# Altium PCB boost.PcbDoc
Units mm, origin at the board's own origin, x right, y up, seen from the top; angles counter-clockwise.
Board outline 50.04 x 50.04 mm, 2 copper layers (Top Layer, Bottom Layer); 27 components, 16 nets, 93 pads, 36 vias.
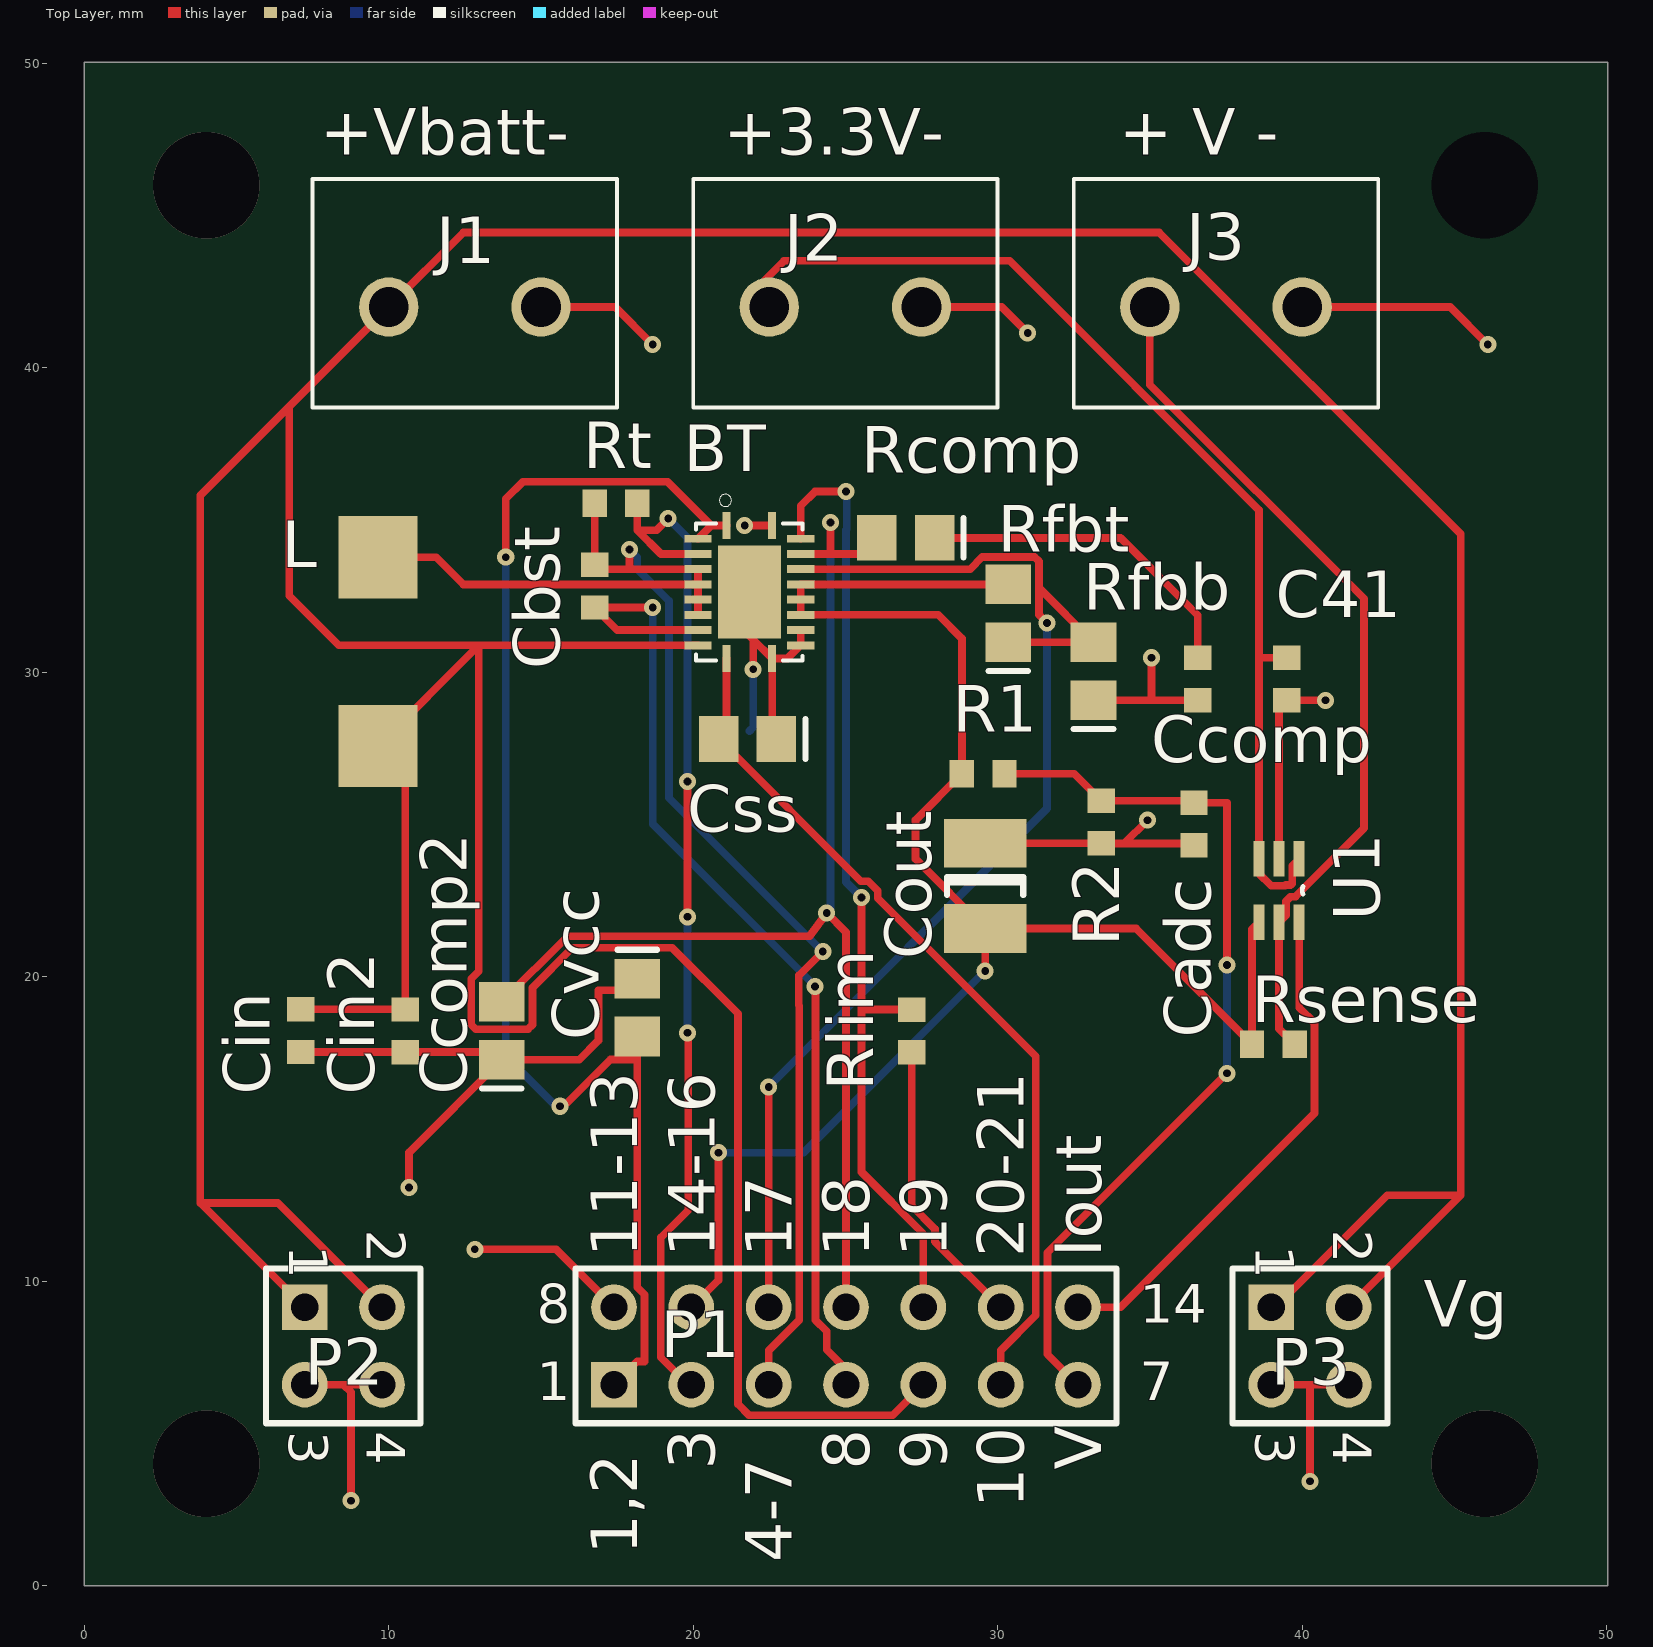
[diagram p0: Top Layer view]
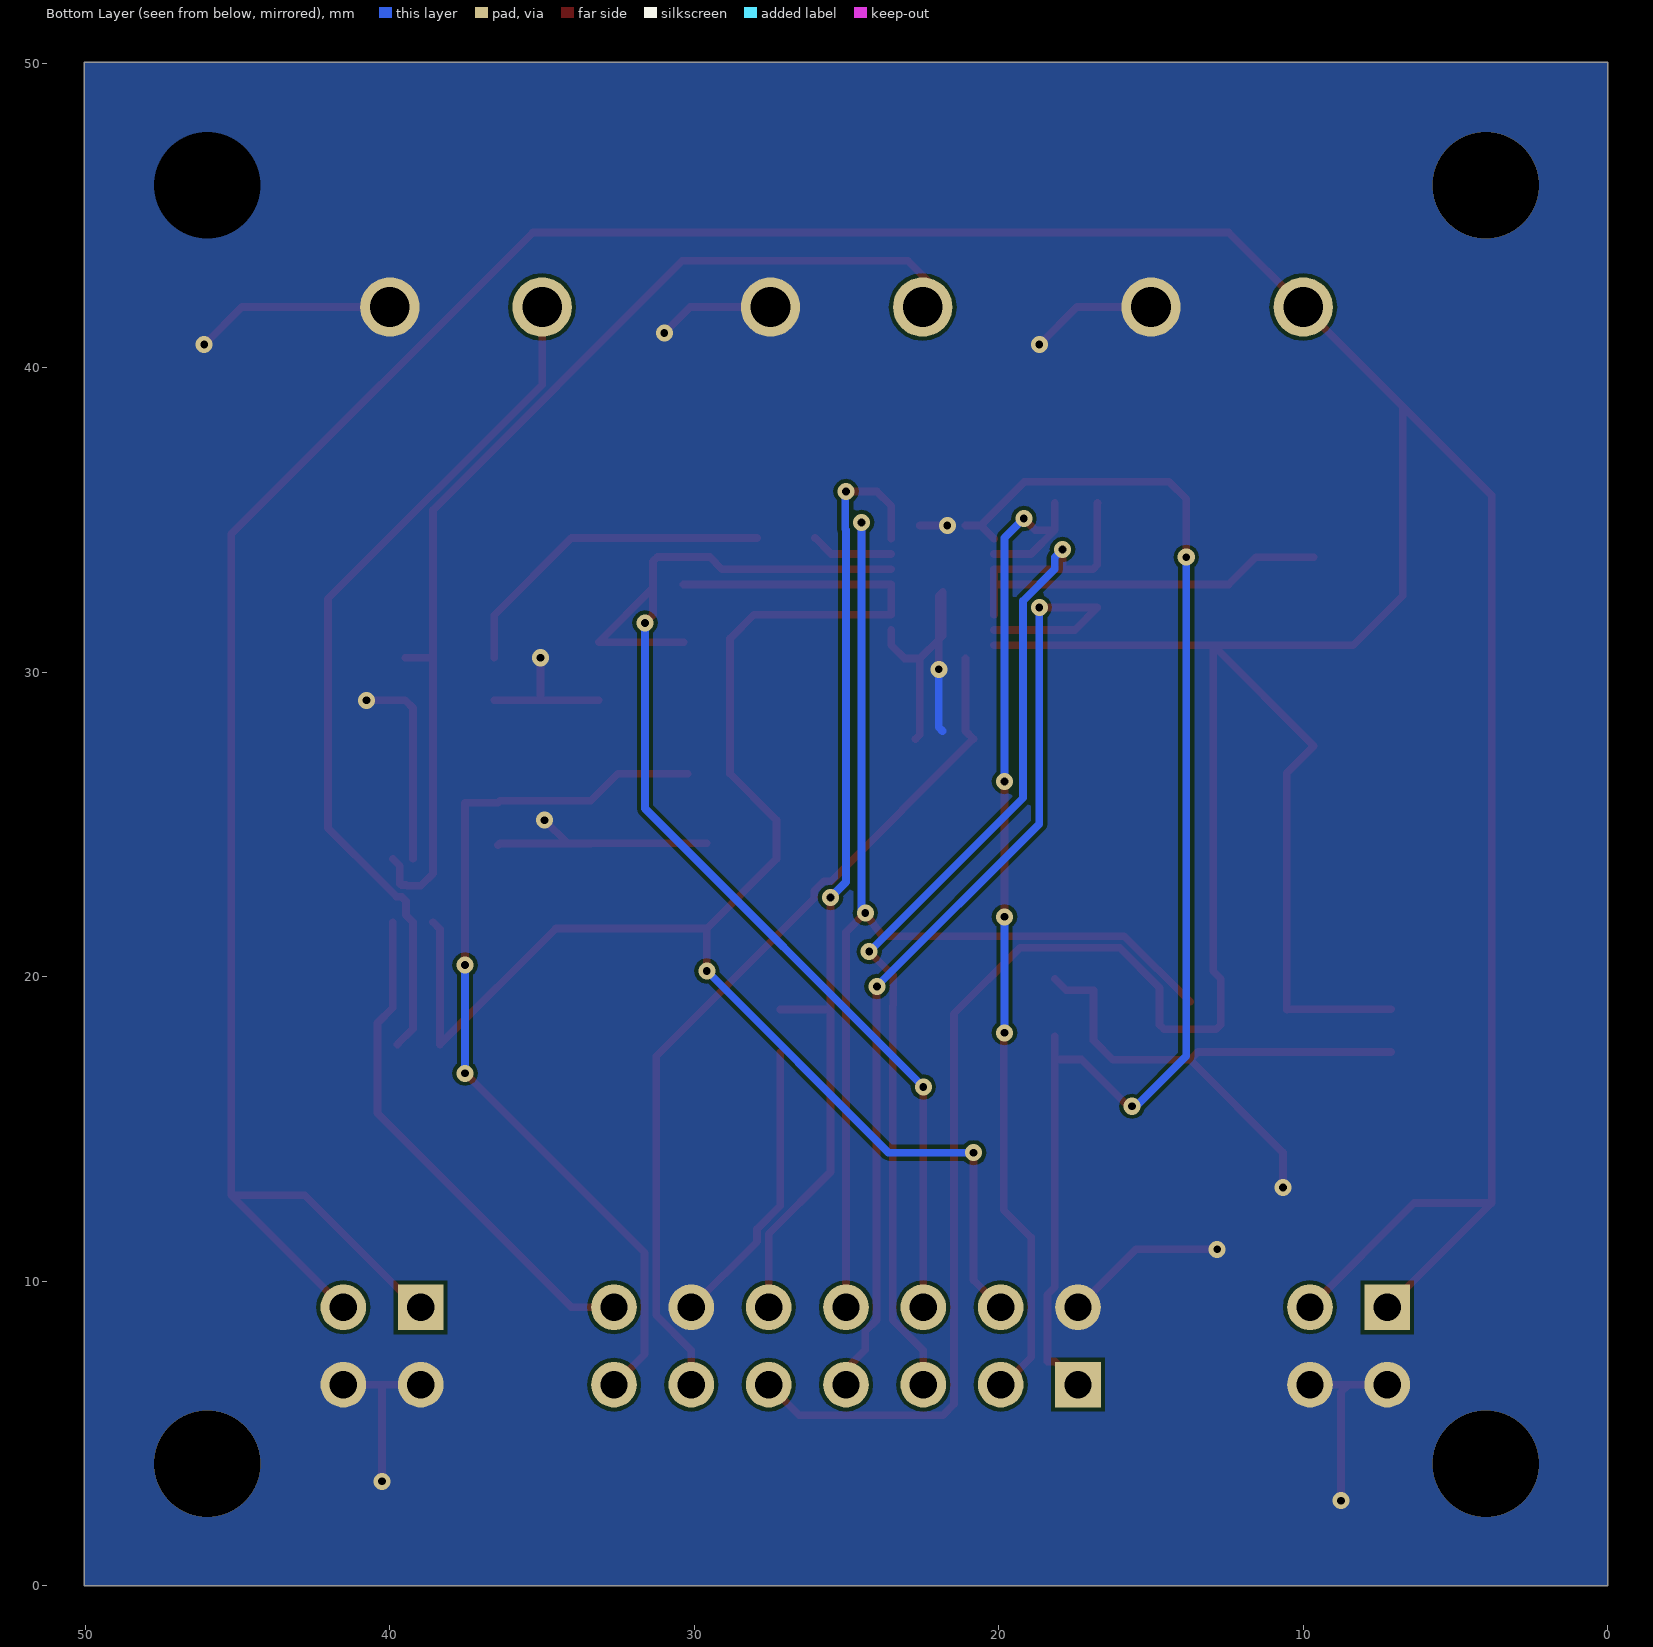
[diagram p1: Bottom Layer view, seen from below]

## Layer stack, top to bottom
Top Solder: solder mask 0.0102, Solder Resist, Dk 3.5
Top Layer: signal copper 0.0356
Dielectric 1: dielectric 0.32, FR-4, Dk 4.8
Bottom Layer: signal copper 0.0356
Bottom Solder: solder mask 0.0102, Solder Resist, Dk 3.5

## Board outline
0,0 0,50.038 50.038,50.038 50.038,0

## Design rules (kind name [scope] priority, off if disabled: settings)
AssemblyTestPointUsage [All] p1 off:
AssemblyTestpoint [All] p1 off: testpointundercomponent=TRUE minsize=1.016 maxsize=2.54 preferedsize=1.524 minholesize=0 maxholesize=1.016 preferedholesize=0.813 testpointgrid=0.025 usegrid=TRUE gridtolerance=0 allowsidetop=TRUE allowsidebottom=TRUE
Clearance [All] p1: gap=0.127 ignorepadtopadclearanceinfootprint=FALSE except(0: Arc-Hole Track-Hole SMDPad-Hole THPad-Hole Via-Hole Fill-Hole Poly-Hole Region-Hole Text-Hole)
FabricationTestPointUsage [All] p1 off: valid=0 allowmultiple=FALSE
FabricationTestpoint [All] p1 off: side=3 testpointundercomponent=FALSE minsize=1.016 maxsize=2.54 preferedsize=1.524 minholesize=0 maxholesize=1.016 preferedholesize=0.813 testpointgrid=0.025 allowsidetop=TRUE allowsidebottom=TRUE usegrid=TRUE gridtolerance=0
HoleSize [All] p1: absolutevalues=TRUE maxlimit=6.35 minlimit=0.203 maxpercent=80.000 minpercent=20.000
MinimumAnnularRing [All] p1: minimumring=0.127
MinimumSolderMaskSliver [All] p1: minsoldermaskwidth=0.102
PlaneConnect [All] p1: planeconnectstyle=Direct reliefexpansion=0.508 reliefentries=4 reliefconductorwidth=0.254 reliefairgap=0.254
PolygonConnect [All] p1: connectstyle=Direct reliefconductorwidth=0.254 reliefentries=4 polygonreliefangle="90 Angle" airgapwidth=0.254
RoutingVias [All] p1: holewidth=0.254 width=0.559 viastyle="Through Hole" minholewidth=0.254 minwidth=0.559 maxholewidth=12.7 maxwidth=12.7
SilkToSilkClearance [All] p1: silktosilkclearance=0
SilkToSolderMaskClearance [IsPad] p1: minsilkscreentomaskgap=0.076 clearancetoexposedcopper=TRUE
SolderMaskExpansion [All] p1: expansion=0.102
Width [All] p1: maxlimit=254 minlimit=0.152 preferedwidth=0.254
21 further rules are at their usual default settings.

## Components (designator, comment, footprint, x,y, rotation, side; value= is the part's Value field where it differs from the comment)
BT "TPS61088" QFN50P450X350X100-21N 21.844,32.639 r0 top
C41 "Cap Semi" 1608[0603] 39.497,29.783 r90 top value=0.1uF
Cadc "" 1608[0603] 36.449,25.019 r270 top value=0.1µF
Cbst "" 1608[0603] 16.764,32.831 r270 top value=100nF
Ccomp "" 1608[0603] 36.576,29.78 r90 top value=470pF
Ccomp2 "" 0805 13.716,18.227 r90 top value=22pF
Cin "" 1608[0603] 7.112,18.23 r90 top value=47µF
Cin2 "" 1608[0603] 10.541,18.227 r90 top value=100nF
Cout "" 1210 29.591,22.984 r270 top value=100µF
Css "8.2nF" 0805 21.783,27.813 r180 top
Cvcc "" 0805 18.161,18.989 r270 top value=2.2µF
J1 "691102710002" 691102710002 12.5,42 r0 top
J2 "691102710002" 691102710002 25,42 r0 top
J3 "691102710002" 691102710002 37.5,42 r0 top
L "" 2-SMD 9.652,30.682 r90 top value=600nH
P1 "Header 7X2A" HDR2X7_CEN 17.399,6.604 r0 top
P2 "Header 2X2" HDR2X2 7.239,9.144 r270 top
P3 "Header 2X2" HDR2X2 38.989,9.144 r270 top
R1 "" 1608[0603] 29.526,26.67 r180 top value=100kO
R2 "" 1608[0603] 33.401,25.081 r90 top value=100kO
Rcomp "" 0805 26.985,34.417 r180 top value=44.2kO
Rfbb "" 0805 33.147,30.033 r90 top value=69.8kO
Rfbt "" 0805 30.353,31.938 r90 top value=220kO
Rlim "" 1608[0603] 27.178,18.223 r90 top value=105kO
Rsense "" 1608[0603] 39.054,17.78 r0 top value=10mO
Rt "RtA1" 1608[0603] 17.461,35.56 r0 top value=267kO
U1 "INA214" SOT65P210X110-6N 39.243,22.835 r270 top

## Footprints (in the part's own frame and the unit in brackets; to place one, negate y for a bottom-side part, rotate by r counter-clockwise, add the part's x,y. Pads: shape width x height; smd on the part's side, far side on the other; paste and mask are expansions set on the pad)
2-SMD [mm]
  rect 2.7x2.6 smd: 1(-3.1,0) 2(3.1,0)
0805 [mm] "Chip Capacitor; Body 2.0 x 1.2 mm (LxW typ)"
  rect 1.3x1.5 smd: 1(-0.95,0) 2(0.95,0)
  silkscreen extent -1.9,-0.65 -1.9,0.65
1210 [mm] "Chip Capacitor; Body 3.2 x 2.5 mm (LxW typ)"
  rect 1.6x2.7 smd: 1(-1.4,0) 2(1.4,0)
  silkscreen extent -0.3,-1.25 0.3,1.25
1608[0603] [mm] "Chip Capacitor, Body 1.6x0.8mm, IPC High Density"
  rect 0.8x0.9 smd: 1(-0.7,0) 2(0.7,0)
  body extent -0.87,-0.48 0.87,0.48, height 1.3
691102710002 [mm]
  round 1.95 hole 1.3: 1(-2.5,0) 2(2.5,0)
  silkscreen extent -5,-3.3 5,4.2
HDR2X2 [mm] "Connector; Header; 2x2 Position"
  rect 1.5x1.5 hole 0.9: 1(0,0)
  round 1.5 hole 0.9: 2(0,2.54) 3(2.54,0) 4(2.54,2.54)
  silkscreen extent -1.27,-1.27 3.81,3.81
HDR2X7_CEN [mm] "Connector; Header; 7x2 Position"
  rect 1.5x1.5 hole 0.9: 1(0,0)
  round 1.5 hole 0.9: 2(2.54,0) 3(5.08,0) 4(7.62,0) 5(10.16,0) 6(12.7,0) 7(15.24,0) 8(0,2.54) 9(2.54,2.54) 10(5.08,2.54) 11(7.62,2.54) 12(10.16,2.54) 13(12.7,2.54) 14(15.24,2.54)
  silkscreen extent -1.27,-1.27 16.51,3.81
QFN50P450X350X100-21N [mm]
  rect 0.26x0.9 smd: 1(-0.75,2.185) 10(-0.75,-2.185) 11(0.75,-2.185) 20(0.75,2.185)
  rect 0.9x0.26 smd: 2(-1.685,1.75) 3(-1.685,1.25) 4(-1.685,0.75) 5(-1.685,0.25) 6(-1.685,-0.25) 7(-1.685,-0.75) 8(-1.685,-1.25) 9(-1.685,-1.75) 12(1.685,-1.75) 13(1.685,-1.25) 14(1.685,-0.75) 15(1.685,-0.25) 16(1.685,0.25) 17(1.685,0.75) 18(1.685,1.25) 19(1.685,1.75)
  rect 2.07x3.07 smd: 21(0,0)
  silkscreen extent -1.75,-2.25 1.75,3.21
SOT65P210X110-6N [mil]
  rect 46x14 smd: 1(-41,26) 2(-41,0) 3(-41,-26) 4(41,-26) 5(41,0) 6(41,26)
  silkscreen extent -5,30 5,31

## Part data
BT: "Boost converter"
C41: "Capacitor (Semiconductor SIM Model)", LatestRevisionDate=29-May-2009, LatestRevisionNote="IPC-7351 Footprint Added.", PackageDescription="Chip Capacitor", PackageReference=C1206, Published=8-Jun-2000, Publisher="Altium Limited"
Cadc Cbst Ccomp Ccomp2 Cin Cin2 Cout Css Cvcc: library part Cap, "Capacitor", LatestRevisionDate=17-Jul-2002, LatestRevisionNote="Re-released for DXP Platform.", PackageDescription="Radial Cap, Thru-Hole; 2 Leads; 0.3 in Pin Spacing", PackageReference=RAD-0.3, Published=8-Jun-2000, Publisher="Altium Limited"
J1 J2 J3: "102 Series 5mm Pitch Straight, PCB Terminal Block, Through Hole, 2 Way", Package=None, Availability=Unavailable, MF="Wurth Electronics", MP=691102710002, Price=None, SnapEDA_Link=https://www.snapeda.com/parts/691102710002/Wurth%20Electronics%20Inc/view-part/?ref=snap
L: library part Inductor, "Inductor", Code_IEC=1005, Code_JEITA=0402, LatestRevisionDate=29-May-2009, LatestRevisionNote="IPC-7351 Footprint Added.", PackageDescription="Chip Inductor", PackageReference=0402-A, Published=8-Jun-2000, Publisher="Altium Limited"
P1: "Header, 7-Pin, Dual row", LatestRevisionDate=17-Jul-2002, LatestRevisionNote="Re-released for DXP Platform.", Publisher="Altium Limited"
P2 P3: "Header, 2-Pin, Dual row", LatestRevisionDate=17-Jul-2002, LatestRevisionNote="Re-released for DXP Platform.", Publisher="Altium Limited"
R1 R2 Rcomp Rfbb Rfbt Rlim Rsense Rt: library part Res2, "Resistor", LatestRevisionDate=17-Jul-2002, LatestRevisionNote="Re-released for DXP Platform.", PackageDescription="Axial Device, Thru-Hole; 2 Leads; 0.4 in Pin Spacing", PackageReference=AXIAL-0.4, Published=8-Jun-2000, Publisher="Altium Limited"
U1: "Current monitor", Supplier Part Number 1=296-38956-6-ND, Supplier 1=Digi-Key

## Via types
v1: diameter 0.559, hole 0.254, Top Layer to Bottom Layer, 32 vias
v2: diameter 3.5, hole 3.5, Top Layer to Bottom Layer, 3 vias
v3: diameter 1.27/1.27 (per signal layer), hole 3.5, Top Layer to Bottom Layer, 1 vias

## Nets (pads, with @x,y where several pads share a name; then routed paths per layer and width w, separated by ;. In a path a pad name is that pad's centre, name@x,y a point inside that pad or via, vN(x,y) a via of type N, cw(c..) or ccw(c..) an arc to the next point about the centre after c; other vN are vias at no path point)
+3V3: C41.2 J2.1 U1.1 U1.3 | length 35.8
  Top Layer w0.254: J2.1@21.757,42.291 22.986,43.52 30.394,43.52 38.583,35.331 38.583,30.48 ; C41.2 38.586,30.483 38.583,30.48 ; U1.1 39.675,23.647 39.675,23.065 39.622,23.012 39.463,23.012 39.437,22.987 38.989,22.987 38.583,23.393 U1.3 38.583,30.48
+5V: J3.1 Rsense.2 U1.5 | length 28.6
  Top Layer w0.254: J3.1 35,39.453 42.037,32.416 42.037,24.888 40.186,23.038 40.183,23.038 40.056,22.911 40.056,22.907 39.78,22.631 39.62,22.631 39.472,22.483 39.472,22.022 U1.5 39.243,18.291 Rsense.2
D1: BT.1 BT.2 Cvcc.2 P1.1 | length 44.7
  Top Layer w0.254: v1(13.843,33.782) 13.843,35.698 14.409,36.264 19.154,36.264 20.594,34.824 ; v1(15.621,15.748) 15.748,15.748 17.281,17.281 18.161,17.281 ; P1.1 18.161,7.366 18.403,7.366 18.403,9.56 18.161,9.802 18.161,17.281 ; Cvcc.2 18.161,17.281 ; BT.2 20.594,34.824 ; BT.1 20.594,34.824
  Bottom Layer w0.254: v1(13.843,33.782) 13.843,17.399 15.494,15.748 v1(15.621,15.748)
D2: BT.3 P1.2 Rt.2 | length 34
  Top Layer w0.254: Rt.2 18.161,34.671 ; v1(19.177,35.052) 18.796,34.671 18.161,34.671 ; v1(19.812,18.161) 19.837,18.136 19.837,12.337 18.935,11.434 18.935,7.505 19.836,6.604 P1.2 ; v1(19.812,21.971) v1(19.812,26.416) ; BT.3 18.943,33.889 18.161,34.671
  Bottom Layer w0.254: v1(19.177,35.052) 19.812,34.417 v1(19.812,26.416) ; v1(19.812,18.161) v1(19.812,21.971)
D3: BT.4 BT.5 BT.6 BT.7 Cbst.1 L.2 P1.3 Rt.1 | length 49.3
  Top Layer w0.254: L.2 11.557,33.782 12.45,32.889 BT.5 ; Rt.1 16.764,35.557 Cbst.1 16.906,33.389 17.907,33.389 ; v1(17.907,34.036) 17.907,33.389 ; BT.7 BT.6 BT.5 ; P1.3 22.479,7.724 23.483,8.728 23.483,19.05 23.47,19.063 23.47,20.041 v1(24.257,20.828) ; 17.907,33.389 BT.4 BT.5
  Bottom Layer w0.254: v1(17.907,34.036) 18.161,33.782 18.161,33.393 19.202,32.352 19.202,25.883 v1(24.257,20.828)
D4: BT.8 Cbst.2 P1.4 | length 33.8
  Top Layer w0.254: v1(18.669,32.131) Cbst.2 17.506,31.389 BT.8 ; v1(24.003,19.685) 24.015,19.673 24.015,8.728 24.384,8.359 24.384,7.747 25.019,7.112 P1.4
  Bottom Layer w0.254: v1(18.669,32.131) 18.669,25.019 v1(24.003,19.685)
D5: BT.9 Cin2.2 Cin.2 J1.1 L.1 P1.5 P2.1 P2.2 P3.1 P3.2 | length 200.3
  Top Layer w0.254: Cin.2 10.538,18.93 Cin2.2 10.541,26.693 L.1 12.959,30.889 ; P2.1 3.81,12.573 ; P2.2 6.35,12.573 3.81,12.573 ; BT.9 12.959,30.889 ; P1.5 26.555,5.6 21.832,5.6 21.475,5.957 21.475,18.784 19.304,20.955 16.033,20.955 14.72,19.642 14.72,18.422 14.571,18.273 12.861,18.273 12.712,18.422 12.712,19.932 12.959,20.179 12.959,30.889 ; P3.1 39.116,9.144 42.799,12.827 45.212,12.827 ; P3.2 45.212,12.827 ; 3.81,12.573 3.81,35.81 6.731,38.731 ; 6.731,38.731 J1.1 12.446,44.446 35.31,44.446 45.212,34.544 45.212,12.827 ; 6.731,38.731 6.731,32.512 8.354,30.889 12.959,30.889
D6: BT.10 Css.2 P1.6 | length 28.9
  Top Layer w0.254: BT.10 21.094,28.074 Css.2 25.507,23.139 25.748,23.139 26.06,22.827 26.06,22.586 31.254,17.392 31.254,8.879 30.099,7.724 P1.6
D8: BT.11 BT.12 BT.13 BT.20 BT.21 C41.1 Cadc.2 Ccomp2.1 Ccomp.1 Cin2.1 Cin.1 Cout.1 Css.1 Cvcc.1 J1.2 J2.2 J3.2 P1.8 P1.13 P2.3 P2.4 P3.3 P3.4 R2.1 Rfbb.1 Rlim.1 U1.2 | length 92.2
  Top Layer w0.254: Cin.1 10.538,17.53 Cin2.1 13.466,17.527 Ccomp2.1 ; P2.3 8.509,6.604 ; v1(8.763,2.794) 8.763,6.35 8.509,6.604 ; P2.4 8.509,6.604 ; v1(10.668,13.081) 10.668,14.229 Ccomp2.1 ; v1(12.827,11.049) 15.494,11.049 P1.8 ; J1.2 17.436,42 v1(18.669,40.767) ; Cvcc.1 17.78,19.558 16.891,19.558 16.891,17.911 16.257,17.277 Ccomp2.1 ; v1(21.691,34.824) BT.20 ; v1(21.971,30.099) 21.971,31.077 ; Css.1 22.594,27.952 BT.11 ; BT.13 BT.12 23.094,30.454 BT.11 ; Rlim.1 27.178,12.477 27.94,11.715 27.94,11.303 P1.13 ; J2.2 30.136,42 v1(30.988,41.148) ; Cout.1 33.398,24.384 R2.1 34.16,24.381 ; Rfbb.1 33.15,29.08 35.052,29.08 ; v1(34.925,25.146) 34.16,24.381 ; v1(35.052,30.48) 35.052,29.08 ; Cadc.2 36.387,24.381 34.16,24.381 ; Ccomp.1 35.052,29.08 ; P3.3 40.259,6.604 ; U1.2 39.243,28.829 C41.1 v1(40.767,29.083) ; J3.2 44.868,42 v1(46.101,40.767) ; v1(40.259,3.429) 40.259,6.604 ; P3.4 40.259,6.604 ; 21.971,31.077 BT.11 ; 21.971,31.077 21.844,31.204 BT.21 21.971,32.512 21.971,31.077
  Bottom Layer w0.254: 21.851,28.074 21.971,28.194 v1(21.971,30.099)
  other v2: 4,4 46,4 4,46
  other v3: 46,46
D9: BT.14 BT.15 BT.16 Cout.2 P1.9 R1.2 Rfbt.2 Rsense.1 U1.4 | length 57.1
  Top Layer w0.254: P1.9 20.828,10.033 v1(20.828,14.224) ; v1(29.591,20.193) Cout.2 ; Rfbt.2 23.53,32.888 BT.16 BT.15 BT.14 28.049,31.889 28.826,31.112 R1.2 27.305,25.149 27.305,23.87 Cout.2 ; U1.4 38.354,21.565 Rsense.1 34.55,21.584 Cout.2
  Bottom Layer w0.254: v1(20.828,14.224) 23.622,14.224 v1(29.591,20.193)
D10: BT.17 P1.10 Rfbb.2 Rfbt.1 | length 41.8
  Top Layer w0.254: P1.10 v1(22.479,16.383) ; BT.17 29.095,33.389 29.498,33.792 31.208,33.792 31.357,33.643 31.357,32.773 ; Rfbt.1 33.142,30.988 31.357,32.773 ; v1(31.623,31.623) 31.357,31.889 31.357,32.773
  Bottom Layer w0.254: v1(22.479,16.383) 31.623,25.527 v1(31.623,31.623)
D11: BT.18 Ccomp2.2 P1.11 Rcomp.2 | length 41.8
  Top Layer w0.254: Ccomp2.2 15.875,21.336 23.83,21.336 v1(24.384,22.098) 25.019,21.463 P1.11 ; BT.18 24.511,33.889 ; v1(24.511,34.925) 24.511,33.889 ; Rcomp.2 25.507,33.889 24.511,33.889
  Bottom Layer w0.254: v1(24.384,22.098) 24.511,22.225 v1(24.511,34.925)
D12: BT.19 P1.12 Rlim.2 | length 32.3
  Top Layer w0.254: BT.19 23.529,35.467 24.003,35.941 v1(25.019,35.941) ; v1(25.527,22.606) 25.527,18.923 ; Rlim.2 25.527,18.923 ; P1.12 27.559,11.557 25.527,13.589 25.527,18.923
  Bottom Layer w0.254: v1(25.019,35.941) 25.044,35.916 25.044,34.704 25.019,34.679 25.019,23.114 v1(25.527,22.606)
Iout: P1.14 U1.6 | length 16.9
  Top Layer w0.254: P1.14 34.036,9.144 40.408,15.516 40.408,18.484 39.903,18.989 U1.6
NetCcomp_2: Ccomp.2 Rcomp.1 | length 11.1
  Top Layer w0.254: Rcomp.1 34.036,34.417 36.576,31.877 Ccomp.2
Vout: Cadc.1 P1.7 R1.1 R2.2 | length 29.7
  Top Layer w0.254: R1.1 32.512,26.67 R2.2 36.387,25.781 Cadc.1 37.53,25.719 v1(37.53,20.385) ; P1.7 31.635,7.608 31.635,10.934 v1(37.53,16.829)
  Bottom Layer w0.254: v1(37.53,16.829) v1(37.53,20.385)

## Polygon pours and split planes (outlines as drawn)
D8 on Bottom Layer "GND" (solid, pour order 4): 0,50.038 0,0 50.038,0 50.038,50.038

## Other copper
Multi-Layer:
  text "Vg" at 2.54,8.509 h1.52

## Silkscreen, mask and mechanical layers (free items; w line width, h text height)
Top Overlay:
  text "+Vbatt-" at 7.747,47 h1.52
  text "+3.3V-" at 21,47 h1.52
  text "+ V -" at 34,47 h1.52
  text "11-13" at 18.161,10.795 h1.52 r90
  text "14-16" at 20.701,10.795 h1.52 r90
  text "17" at 23.241,10.795 h1.52 r90
  text "18" at 25.781,10.795 h1.52 r90
  text "19" at 28.321,10.795 h1.52 r90
  text "20-21" at 30.861,10.795 h1.52 r90
  text "Iout" at 33.401,10.795 h1.52 r90
  text "Vg" at 44,8.5 h1.52
  text "3" at 20.701,3.81 h1.52 r90
  text "8" at 25.781,3.81 h1.52 r90
  text "9" at 28.321,3.81 h1.52 r90
  text "V" at 33.401,3.81 h1.52 r90
  text "10" at 30.861,2.54 h1.52 r90
  text "1,2" at 18.161,1.016 h1.52 r90
  text "4-7" at 23.241,0.762 h1.52 r90

## Text inside footprints (layer, text, board x,y; h text height)
J1: Mechanical 1 "1" at 8.844,39.346 h1.88
J2: Mechanical 1 "1" at 21.344,39.346 h1.88
J3: Mechanical 1 "1" at 33.844,39.346 h1.88
P1: Top Overlay "8" at 14.859,8.636 h1.27; Top Overlay "1" at 14.859,6.096 h1.27; Top Overlay "7" at 34.671,6.096 h1.27; Top Overlay "14" at 34.671,8.636 h1.27
P2: Top Overlay "1" at 6.731,11.176 h1.27 r270; Top Overlay "2" at 9.271,11.684 h1.27 r270; Top Overlay "4" at 9.271,5.08 h1.27 r270; Top Overlay "3" at 6.731,5.08 h1.27 r270
P3: Top Overlay "1" at 38.481,11.176 h1.27 r270; Top Overlay "2" at 41.021,11.684 h1.27 r270; Top Overlay "4" at 41.021,5.08 h1.27 r270; Top Overlay "3" at 38.481,5.08 h1.27 r270